# Altium PCB PCB.PcbDoc
Units mil, origin at the board's own origin, x right, y up, seen from the top; angles counter-clockwise.
Board outline 2075 x 2175 mil, 2 copper layers (Top Layer, Bottom Layer); 18 components, 24 nets, 92 pads, 0 vias.
Unrouted connection lines stored in the file: 1.
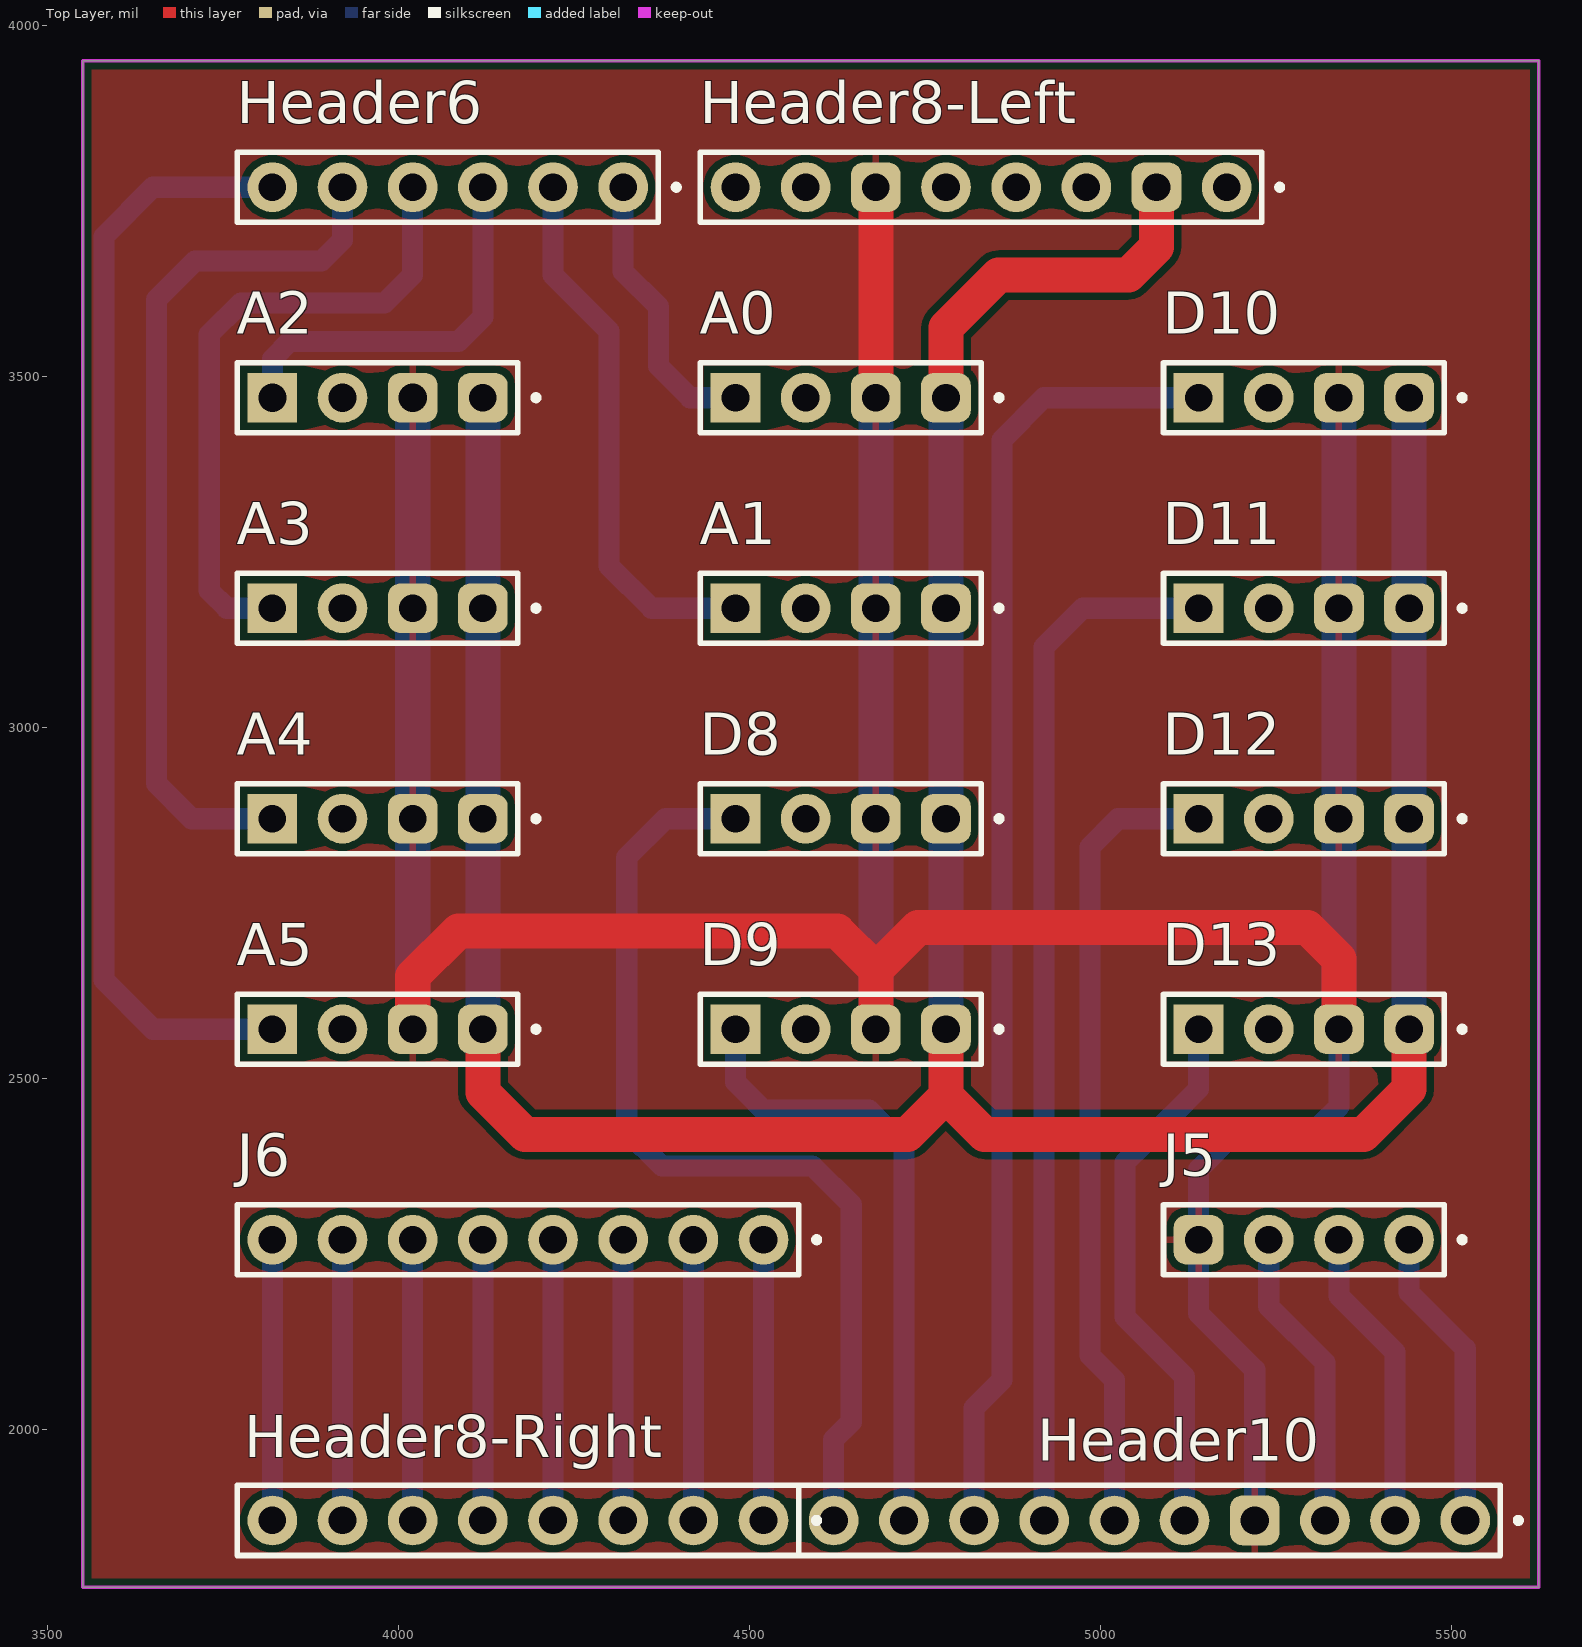
[diagram p0: Top Layer view]
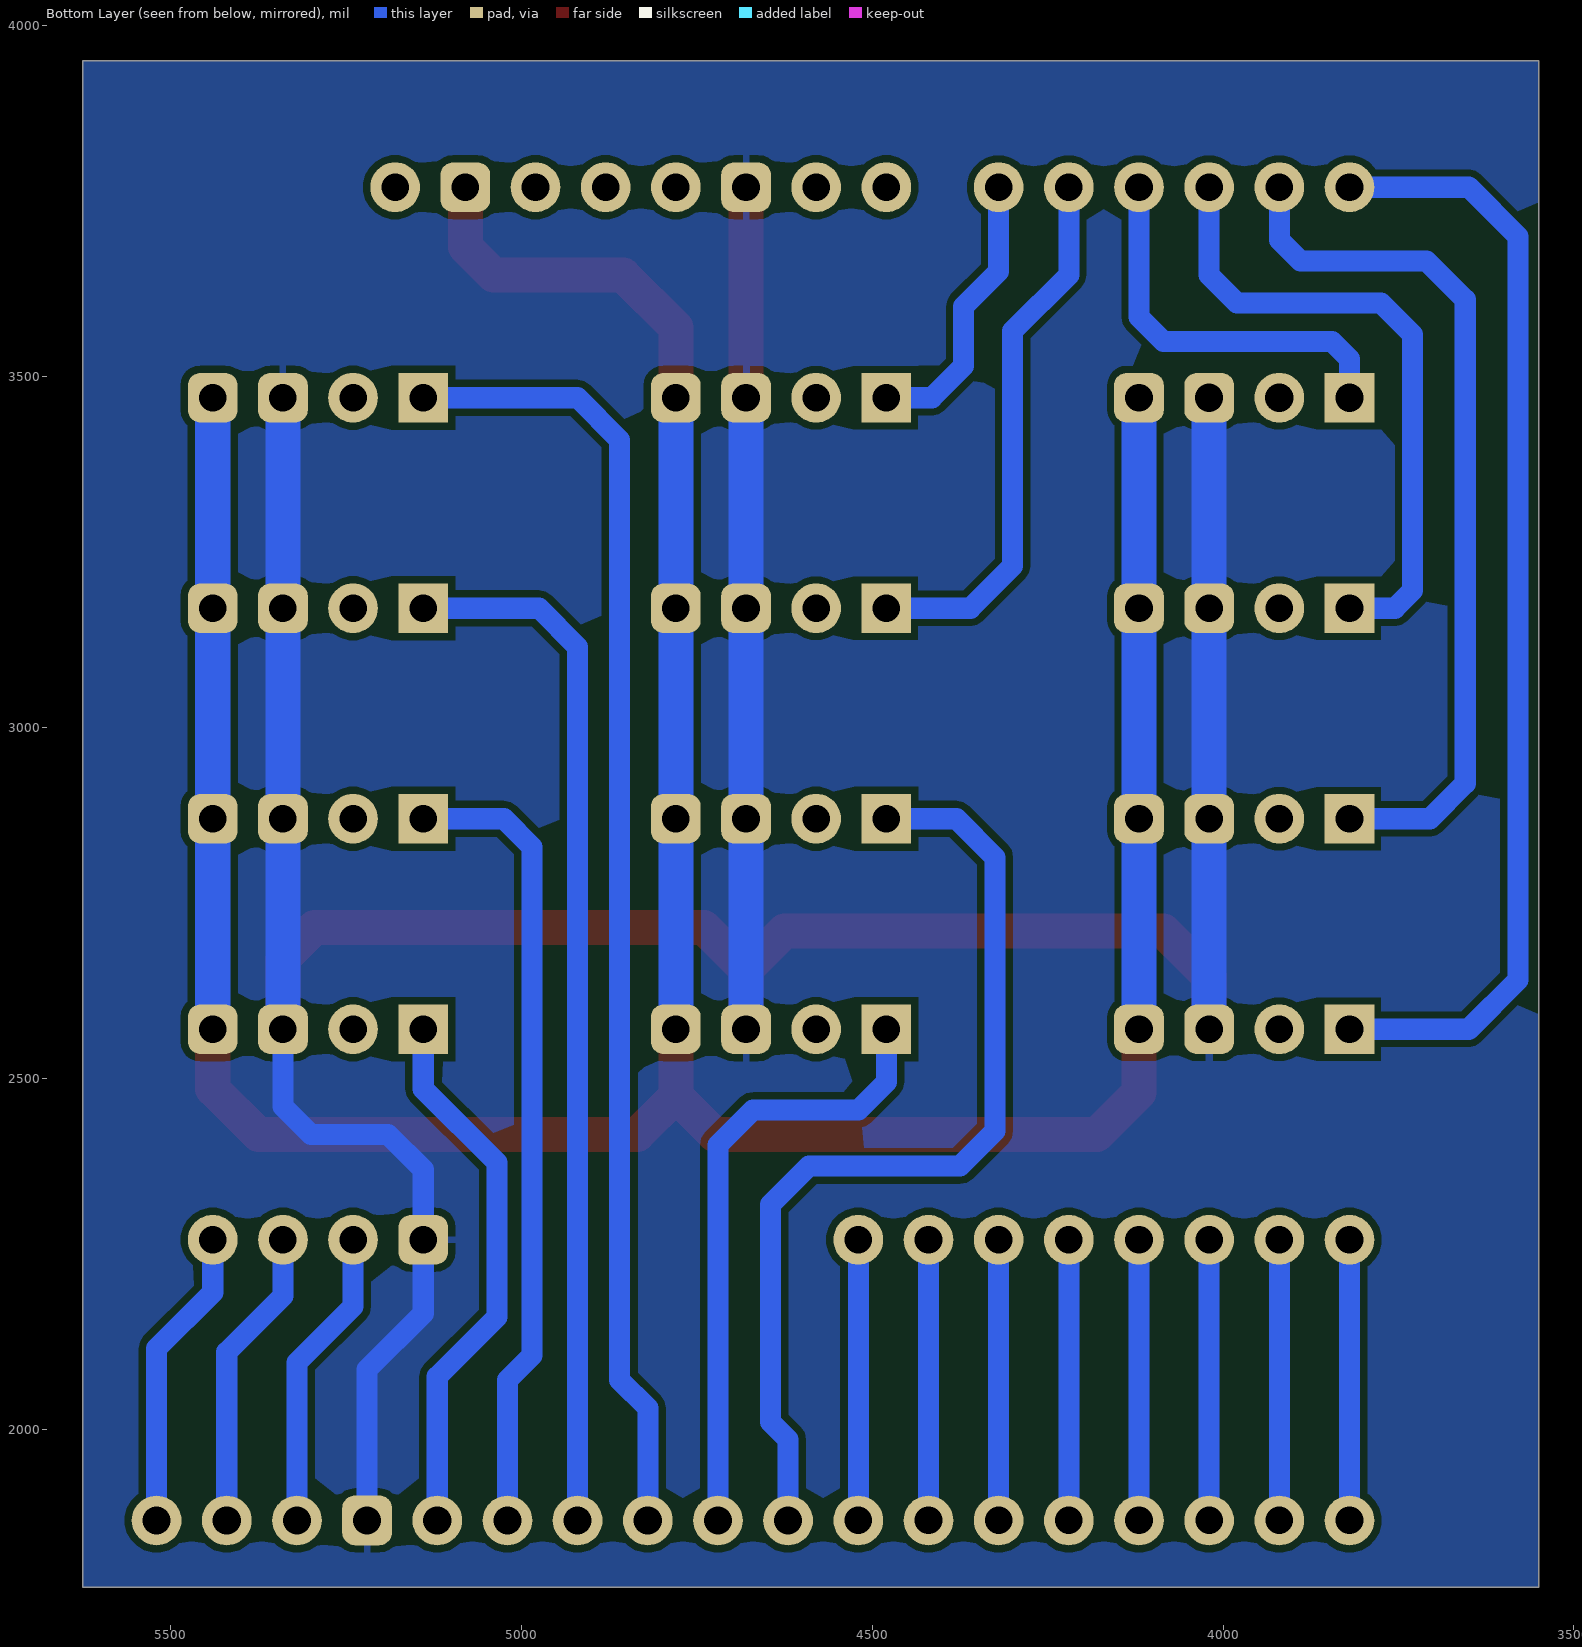
[diagram p1: Bottom Layer view, seen from below]

## Layer stack, top to bottom
Top Solder: solder mask 0.4, Solder Resist, Dk 3.5
Top Layer: signal copper 1.4
Dielectric 1: dielectric 12.6, FR-4, Dk 4.8
Bottom Layer: signal copper 1.4
Bottom Solder: solder mask 0.4, Solder Resist, Dk 3.5

## Board outline
3550,1775 3550,3950 5625,3950 5625,1775

## Design rules (kind name [scope] priority, off if disabled: settings)
Clearance [All] p1: gap=10 ignorepadtopadclearanceinfootprint=FALSE
PolygonConnect [All] p1: connectstyle=Relief reliefconductorwidth=10 reliefentries=4 polygonreliefangle="90 Angle" airgapwidth=10
RoutingVias [All] p1: holewidth=28 width=50 viastyle="Through Hole" minholewidth=28 minwidth=50 maxholewidth=28 maxwidth=50
SolderMaskExpansion [All] p1: expansion=4 istentingtop=FALSE
Width [All] p1: maxlimit=50 minlimit=30 preferedwidth=50
30 further rules are at their usual default settings.

## Components (designator, comment, footprint, x,y, rotation, side; value= is the part's Value field where it differs from the comment)
A0 "TSW-104-08-L-S-LL" SAMTEC_TSW-104-08-L-S-LL#1 4780,3470 r180 top
A1 "TSW-104-08-L-S-LL" SAMTEC_TSW-104-08-L-S-LL#1 4780,3170 r180 top
A2 "TSW-104-08-L-S-LL" SAMTEC_TSW-104-08-L-S-LL#2 4120,3470 r180 top
A3 "TSW-104-08-L-S-LL" SAMTEC_TSW-104-08-L-S-LL#1 4120,3170 r180 top
A4 "TSW-104-08-L-S-LL" SAMTEC_TSW-104-08-L-S-LL#1 4120,2870 r180 top
A5 "TSW-104-08-L-S-LL" SAMTEC_TSW-104-08-L-S-LL#1 4120,2570 r180 top
D8 "TSW-104-08-L-S-LL" SAMTEC_TSW-104-08-L-S-LL#1 4780,2870 r180 top
D9 "TSW-104-08-L-S-LL" SAMTEC_TSW-104-08-L-S-LL#1 4780,2570 r180 top
D10 "TSW-104-08-L-S-LL" SAMTEC_TSW-104-08-L-S-LL#1 5440,3470 r180 top
D11 "TSW-104-08-L-S-LL" SAMTEC_TSW-104-08-L-S-LL#1 5440,3170 r180 top
D12 "TSW-104-08-L-S-LL" SAMTEC_TSW-104-08-L-S-LL#1 5440,2870 r180 top
D13 "TSW-104-08-L-S-LL" SAMTEC_TSW-104-08-L-S-LL#1 5440,2570 r180 top
Header6 "MTSW-106-08-T-S-300-LL" SAMTEC_MTSW-106-08-T-S-300-LL 4070,3770 r0 top
Header8-Left "TSW-108-06-G-S-LL" SAMTEC_TSW-108-06-G-S-LL#1 5180,3770 r180 top
Header8-Right "TSW-108-06-G-S-LL" SAMTEC_TSW-108-06-G-S-LL#2 4520,1870 r180 top
Header10 "MTSW-110-10-G-S-595" SAMTEC_MTSW-110-10-G-S-595 5070,1870 r0 top
J5 "TSW-104-08-L-S-LL" SAMTEC_TSW-104-08-L-S-LL#3 5440,2270 r180 top
J6 "TSW-108-06-G-S-LL" SAMTEC_TSW-108-06-G-S-LL#2 4520,2270 r180 top

## Footprints (in the part's own frame and the unit in brackets; to place one, negate y for a bottom-side part, rotate by r counter-clockwise, add the part's x,y. Pads: shape width x height; smd on the part's side, far side on the other; paste and mask are expansions set on the pad)
SAMTEC_MTSW-106-08-T-S-300-LL [mm]
  round 1.8 hole 1: 01(6.35,0) 02(3.81,0) 03(1.27,0) 04(-1.27,0) 05(-3.81,0) 06(-6.35,0)
  silkscreen extent -7.62,-1.27 8.37,1.27
SAMTEC_MTSW-110-10-G-S-595 [mm]
  round 1.8 hole 1.02: 01(11.43,0) 02(8.89,0) 03(6.35,0) 05(1.27,0) 06(-1.27,0) 07(-3.81,0) 08(-6.35,0) 09(-8.89,0) 10(-11.43,0)
  rrect50% 1.8x1.8 hole 1.02: 04(3.81,0)
  silkscreen extent -12.7,-1.27 13.45,1.27
SAMTEC_TSW-104-08-L-S-LL#1 [mm]
  rrect50% 1.8x1.8 hole 1: 01(0,0) 02(2.54,0)
  round 1.8 hole 1: 03(5.08,0)
  rect 1.8x1.8 hole 1: 04(7.62,0)
  silkscreen extent -2.02,-1.27 8.89,1.27
SAMTEC_TSW-104-08-L-S-LL#2 [mm]
  rrect50% 1.8x1.8 hole 1: 01(0,0)
  rrect50% 1.8x1.8 hole 1.02: 02(2.54,0)
  round 1.8 hole 1.02: 03(5.08,0)
  rect 1.8x1.8 hole 1.02: 04(7.62,0)
  silkscreen extent -2.02,-1.27 8.89,1.27
SAMTEC_TSW-104-08-L-S-LL#3 [mm]
  round 1.8 hole 1: 01(0,0) 02(2.54,0) 03(5.08,0)
  rrect50% 1.8x1.8 hole 1: 04(7.62,0)
  silkscreen extent -2.02,-1.27 8.89,1.27
SAMTEC_TSW-108-06-G-S-LL#1 [mm]
  round 1.8 hole 1: 01(0,0) 03(5.08,0) 04(7.62,0) 05(10.16,0) 07(15.24,0) 08(17.78,0)
  rrect50% 1.8x1.8 hole 1: 02(2.54,0) 06(12.7,0)
  silkscreen extent -2.02,-1.27 19.05,1.27
SAMTEC_TSW-108-06-G-S-LL#2 [mm]
  round 1.8 hole 1: 01(0,0) 02(2.54,0) 03(5.08,0) 04(7.62,0) 05(10.16,0) 06(12.7,0) 07(15.24,0) 08(17.78,0)
  silkscreen extent -2.02,-1.27 19.05,1.27

## Part data
A0 A1 A2 A3 A4 A5 D8 D9 D10 D11 D12 D13 Header6 Header8-Left Header8-Right Header10 J5 J6: Package=None, Availability=Unavailable, Price=None
  A0 A1 A2 A3 A4 A5 D8 D9 D10 D11 D12 D13 J5: MP=TSW-104-08-L-S-LL
  Header6: MP=MTSW-106-08-T-S-300-LL
  Header8-Left Header8-Right J6: MP=TSW-108-06-G-S-LL
  Header10: MP=MTSW-110-10-G-S-595

## Nets (pads, with @x,y where several pads share a name; then routed paths per layer and width w, separated by ;. In a path a pad name is that pad's centre, name@x,y a point inside that pad or via, vN(x,y) a via of type N, cw(c..) or ccw(c..) an arc to the next point about the centre after c; other vN are vias at no path point)
3.3V: A0.01 A1.01 A2.01 A3.01 A4.01 A5.01 D8.01 D9.01 D10.01 D11.01 D12.01 D13.01 Header8-Left.02 Header10.03 J5.03 | length 5353.1
  Top Layer w50: A5.01 4120,2480 4180,2420 4725,2420 4780,2475 ; D9.01 4780,2475 ; A0.01 4780,3570 4855,3645 5040,3645 5080,3685 Header8-Left.02 ; D13.01 5440,2485 5375,2420 4835,2420 4780,2475
  Bottom Layer w30: J5.03 5240,2175 5320,2095 Header10.03
  Bottom Layer w50: A5.01 A4.01 A3.01 A2.01 ; D9.01 D8.01 A1.01 A0.01 ; D13.01 D12.01 D11.01 D10.01
A0: A0.04 Header6.01 | length 404.4
  Bottom Layer w30: Header6.01 4320,3650 4370,3600 4370,3515 4415,3470 A0.04
A1: A1.04 Header6.02 | length 778
  Bottom Layer w30: Header6.02 4220,3645 4300,3565 4300,3230 4360,3170 A1.04
A2: A2.04 Header6.03 | length 565.1
  Bottom Layer w30: A2.04 3820,3525.43 3844.57,3550 4085,3550 4120,3585 Header6.03
A3: A3.04 Header6.04 | length 915.6
  Bottom Layer w30: A3.04 3755,3170 3730,3195 3730,3560 3775,3605 3980,3605 4020,3645 Header6.04
A4: A4.04 Header6.05 | length 1250.9
  Bottom Layer w30: A4.04 3705,2870 3655,2920 3655,3610 3710,3665 3890,3665 3920,3695 Header6.05
A5: A5.04 Header6.06 | length 1598
  Bottom Layer w30: A5.04 3650,2570 3580,2640 3580,3700 3650,3770 Header6.06
D0/RX: Header8-Right.08 J6.08 | length 400
  Bottom Layer w30: Header8-Right.08 J6.08
D1/TX: Header8-Right.07 J6.07 | length 400
  Bottom Layer w30: Header8-Right.07 J6.07
D2: Header8-Right.06 J6.06 | length 400
  Bottom Layer w30: Header8-Right.06 J6.06
D3: Header8-Right.05 J6.05 | length 400
  Bottom Layer w30: Header8-Right.05 J6.05
D4: Header8-Right.04 J6.04 | length 400
  Bottom Layer w30: Header8-Right.04 J6.04
D5: Header8-Right.03 J6.03 | length 400
  Bottom Layer w30: Header8-Right.03 J6.03
D6: Header8-Right.02 J6.02 | length 400
  Bottom Layer w30: Header8-Right.02 J6.02
D7: Header8-Right.01 J6.01 | length 400
  Bottom Layer w30: Header8-Right.01 J6.01
D8: D8.04 Header10.10 | length 1391.6
  Bottom Layer w30: D8.04 4380,2870 4325,2815 4325,2425 4375,2375 4590,2375 4645,2320 4645,2010 4620,1985 Header10.10
D9: D9.04 Header10.09 | length 887.3
  Bottom Layer w30: D9.04 4480,2495 4520,2455 4670,2455 4720,2405 Header10.09
D10: D10.04 Header10.08 | length 1861.4
  Bottom Layer w30: Header10.08 4820,2030 4860,2070 4860,3410 4920,3470 D10.04
D11: D11.04 Header10.07 | length 1487.8
  Bottom Layer w30: Header10.07 4920,3115 4975,3170 D11.04
D12: D12.04 Header10.06 | length 1146.1
  Bottom Layer w30: Header10.06 5020,2070 4985,2105 4985,2830 5025,2870 D12.04
D13: D13.04 Header10.05 | length 778.7
  Bottom Layer w30: Header10.05 5120,2075 5035,2160 5035,2380 5140,2485 D13.04
GND: A0.02 A1.02 A2.02 A3.02 A4.02 A5.02 D8.02 D9.02 D10.02 D11.02 D12.02 D13.02 Header8-Left.06 Header10.04 J5.04 | length 5553.6
  Top Layer w50: A5.02 4020,2645 4085,2710 4625,2710 4680,2655 ; D9.02 4680,2655 ; A0.02 Header8-Left.06 ; D13.02 5340,2670 5295,2715 4740,2715 4680,2655
  Bottom Layer w30: Header10.04 5220,2085 5140,2165 J5.04 5140,2370 5190,2420 5300,2420 5340,2460 D13.02
  Bottom Layer w50: A5.02 A4.02 A3.02 A2.02 ; D9.02 D8.02 A1.02 A0.02 ; D13.02 D12.02 D11.02 D10.02
SCL: Header10.01 J5.01 | length 433.1
  Bottom Layer w30: J5.01 5440,2195 5520,2115 Header10.01
SDA: Header10.02 J5.02 | length 433.1
  Bottom Layer w30: J5.02 5340,2190 5420,2110 Header10.02
pads on no net: A0.03 A1.03 A2.03 A3.03 A4.03 A5.03 D8.03 D9.03 D10.03 D11.03 D12.03 D13.03 Header8-Left.01 Header8-Left.03 Header8-Left.04 Header8-Left.05 Header8-Left.07 Header8-Left.08

## Polygon pours and split planes (outlines as drawn)
GND on Bottom Layer "GND_L02_P000" (solid, remove dead copper, pour order 0): 3550,3950 5625,3950 5625,1775 3550,1775
GND on Top Layer "GND_L01_P001" (solid, remove dead copper, pour order 1): 3550,3950 5625,3950 5625,1775 3550,1775

## Keep-outs
Top Layer:
  lines w5: 3550,1775 5625,1775 5625,3550 5625,3950 3550,3950 3550,1775